# EAGLE board BatteryHullBoard (EAGLE 9.2.0)
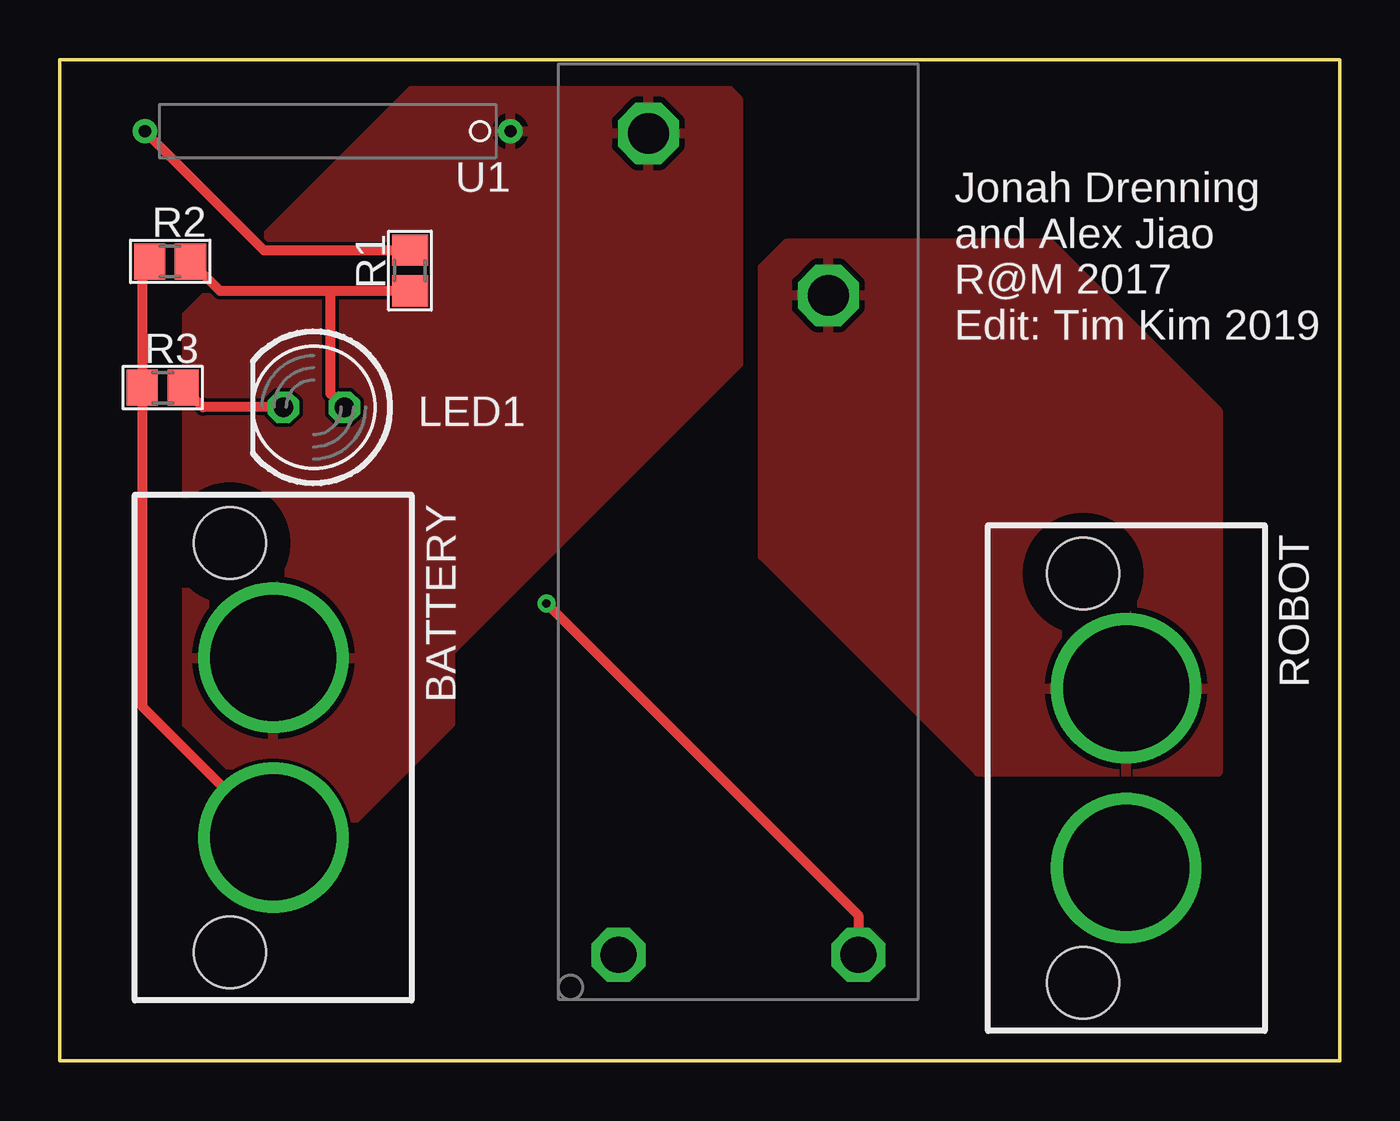
[diagram p0: board, top side]
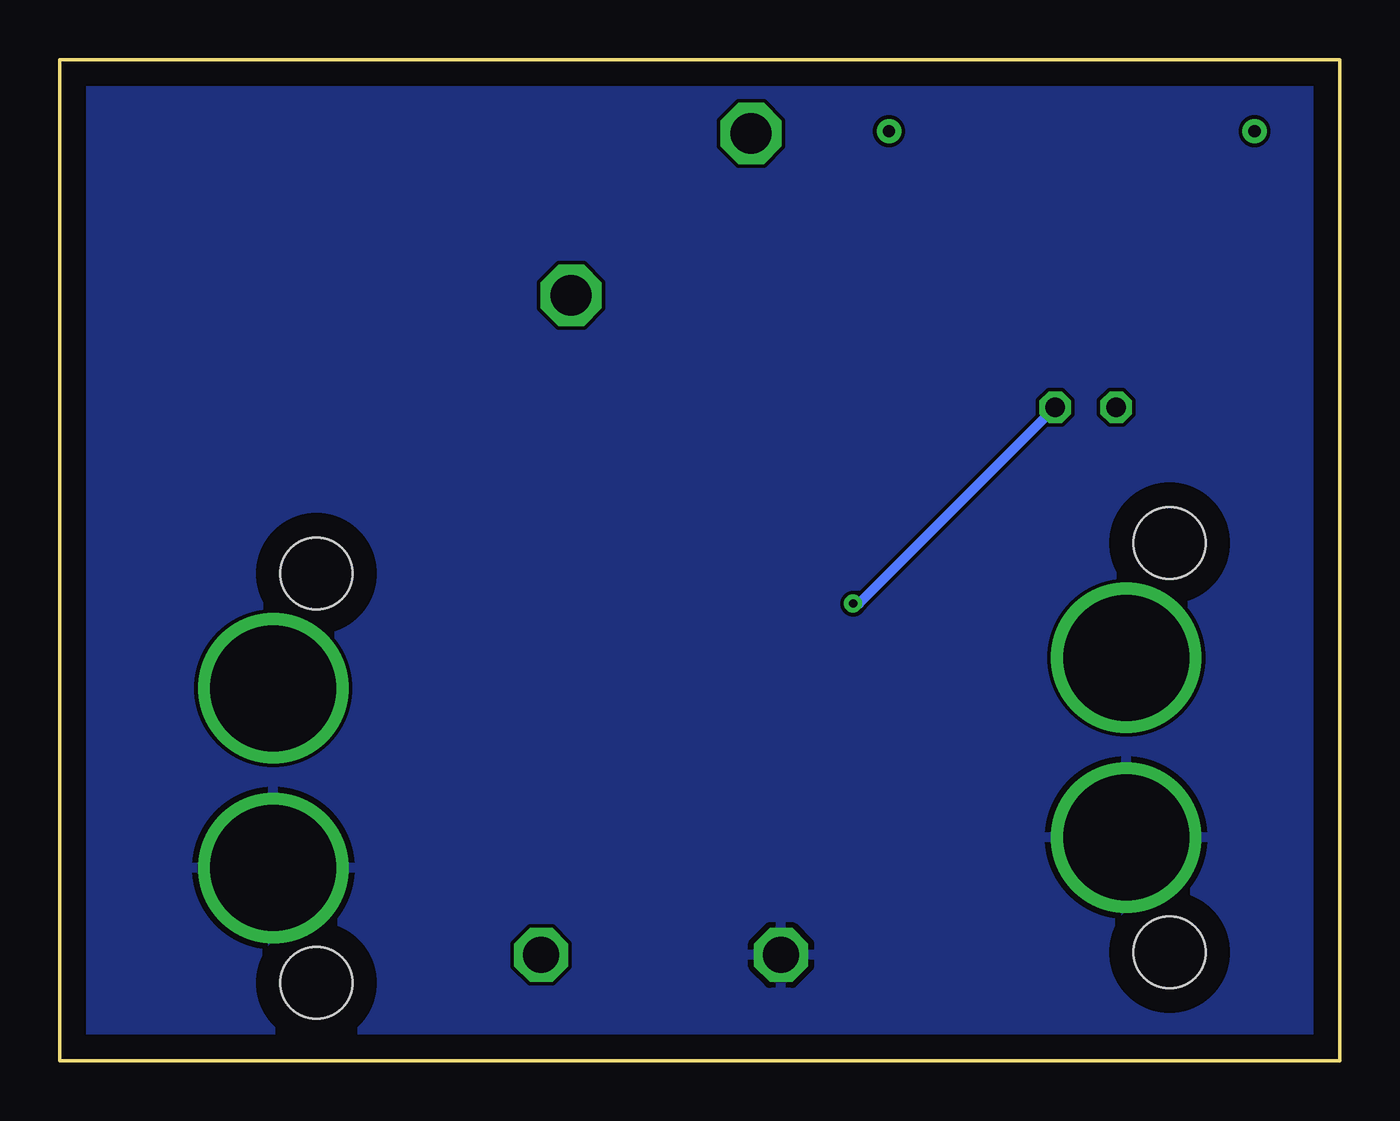
[diagram p1: board, bottom side, seen from below]

Size 53.34 x 41.72 mm. Coordinates in mm from the lower left corner, seen from the top.
Outline: 53.34,0 0,0 0,41.72 53.34,41.72 53.34,0
Copper layers (1*16): Top 0.035mm / dielectric 1.5mm / Bottom 0.035mm
Design rules "default": minimum track width 6mil, minimum drill 0.35mm, track to track 6mil, track to pad 6mil, pad to pad 6mil, via to via 6mil, smd to smd 6mil, copper to edge 40mil, drill to drill 6mil, minimum pad ring 10mil, minimum via ring 8mil, stop-mask expansion 4mil, vias tented up to drill 0mil, thermal gap 10mil

## Footprints (pad centres in the part's own frame; a part is rotated, then mirrored left to right if it is on the bottom)
SUPERSABRE_2CIRCUIT = drill 5.25: P$1 -3.747,0; P$2 3.747,0 | hole 2.997: -8.534,-1.803; 8.534,-1.803
LED5MM = drill 0.813 octagon: A -1.27,0; K 1.27,0
R0805 = smd 1.3 x 1.5: 1 -0.85,0; 2 0.85,0
KSK-1E66 = drill 0.508 pad 0.762: P$1 -7.62,0; P$2 7.62,0
ADJH21112 = drill 1.5 octagon: CONRTOL+ -17.65,-5; CONTROL- -17.65,5 | drill 1.7 octagon: INPUT 16.6,3.75; OUTPUT 9.85,-3.75

## Placement (x,y rotation side)
BATTERY  2_SUPERSABRE  [SUPERSABRE_2CIRCUIT]  8.89,13.05 270 top
LED1  [LED5MM]  10.58,27.24 180 top
R1  1000  [R0805]  14.59,32.94 90 top
R2  7700  [R0805]  4.59,33.32 0 top
R3  10000  [R0805]  4.28,28.06 0 top
ROBOT  2_SUPERSABRE  [SUPERSABRE_2CIRCUIT]  44.45,11.78 270 top
U1  KSK-1E66  [KSK-1E66]  11.16,38.75 180 top
U$1  ADJH21112  [ADJH21112]  28.28,22.06 90 top

## Library data of the parts
BATTERY ROBOT = molex
LED1 = led
R1-R3 = resistor
U1 = KSK-1E66
U$1 = switch

## Nets
GND: BATTERY.P$2 R2.1 R3.1 ROBOT.P$2 U$1.CONTROL-
N$1: R1.2 U1.P$2
N$3: LED1.A R1.1 R2.2 U$1.CONRTOL+
N$4: LED1.K R3.2
PWR1: BATTERY.P$1 U1.P$1 U$1.INPUT
PWR2: ROBOT.P$1 U$1.OUTPUT

## Tracks (layer width: path | path; a pad name or v marks a point on that pad's centre or on a via)
GND
  Top 0.406: R2.1 3.43,33.01 R3.1 3.43,14.76 BATTERY.P$2
  pour Bottom: 0.28,42.06 53.28,42.06 53.28,0.06 0.28,0.06
N$1
  Top 0.406: U1.P$2 8.5,33.79 R1.2
N$3  (via drill 0.35)
  Top 0.406: R1.1 11.28,32.09 | 11.28,32.09 6.67,32.09 R2.2 | LED1.A 11.28,27.81 11.28,32.09 | v20.28,19.06 33.28,6.06 U$1.CONRTOL+
  Bottom 0.406: LED1.A 20.03,19.06 v20.28,19.06
N$4
  Top 0.406: LED1.K 5.95,27.24 R3.2
PWR1
  pour Top: 5.28,31.06 5.28,14.06 9.28,10.06 12.28,10.06 16.28,14.06 16.28,17.06 28.28,29.06 28.28,40.06 26.28,42.06 16.28,42.06
PWR2
  pour Top: 38.28,12.06 48.28,12.06 48.28,27.06 41.28,34.06 30.28,34.06 29.28,33.06 29.28,21.06

## Text on the board
tPlace: Jonah Drenning / and Alex Jiao / R@M 2017 / Edit: Tim Kim 2019